# Altium PCB Z693_Test_JK08_V1.0.PcbDoc (part 2 of 2)
Units mil, origin at the board's own origin, x right, y up, seen from the top; angles counter-clockwise.
Board outline 3841.14 x 4075.65 mil, 2 copper layers (Top Layer, Bottom Layer); 150 components, 98 nets, 518 pads, 261 vias.
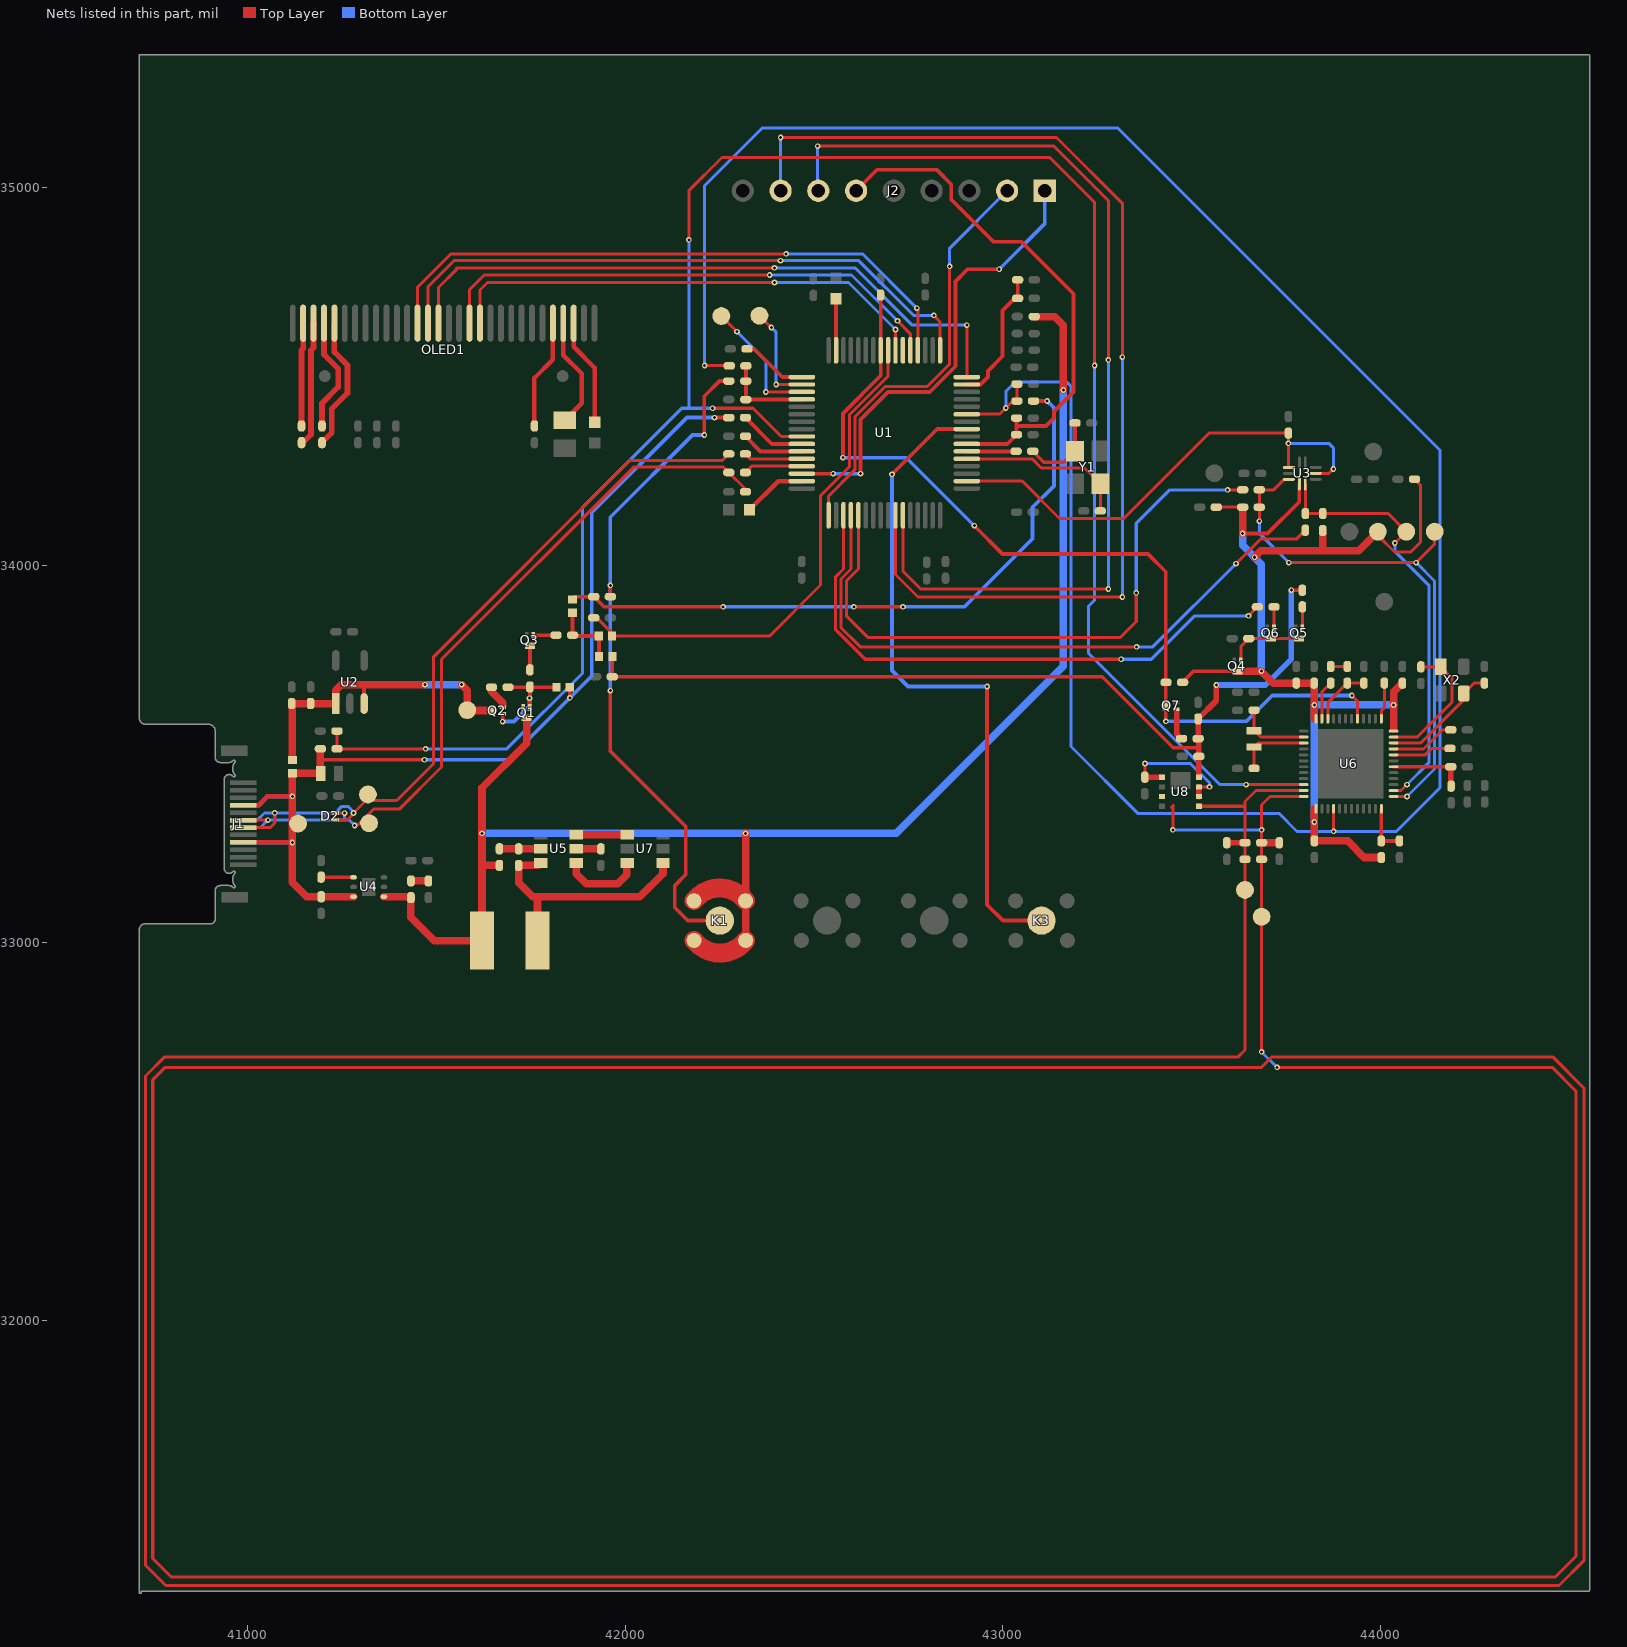
[diagram p2: the nets of this part, all layers, seen from the top]

## Via types
v1: diameter 15, hole 8, Top Layer to Bottom Layer, tented both sides, 261 vias

## Nets (pads, with @x,y where several pads share a name; then routed paths per layer and width w, separated by ;. In a path a pad name is that pad's centre, name@x,y a point inside that pad or via, vN(x,y) a via of type N, cw(c..) or ccw(c..) an arc to the next point about the centre after c; other vN are vias at no path point) (continued)
KEY-UP: K3.1 U1.9 | length 1776.9
  Top Layer w10: v1(42705.89,34240.83) 42825.73,34360.68 U1.9@42904.28,34360.68 ; v1(42957.89,33678.83) 42957.89,33100.83 42999.89,33058.83 K3.1@43102,33058.83
  Bottom Layer w10: v1(42705.89,34240.83) 42705.89,33720.94 42748,33678.83 v1(42957.89,33678.83)
LCD_D/C: OLED1.15 U1.16 | length 1714.5
  Top Layer w8: OLED1.15@41504.61,34641.09 41504.61,34735.55 41552.89,34783.83 ; 41552.89,34787.83 v1(42394.89,34787.83) ; U1.16@42904.28,34498.47 v1(42904.28,34635.83)
  Bottom Layer w8: v1(42394.89,34787.83) 42607.89,34787.83 42759.89,34635.83 v1(42904.28,34635.83)
LCD_RESET: OLED1.14 U1.17 | length 1624.7
  Top Layer w8: OLED1.14@41477.05,34641.09 41477.05,34737.99 41545.89,34806.83 v1(42410.89,34806.83) ; v1(42816.89,34661.83) 42833.42,34645.31 U1.17@42833.42,34569.34
  Bottom Layer w8: v1(42410.89,34806.83) 42617.89,34806.83 42762.89,34661.83 v1(42816.89,34661.83)
MCU_EN: D5.1 R28.1 U1.24 | length 1376.3
  Top Layer w8: R28.1@41916,33860.66 41923.9,33860.66 41964.72,33819.85 D5.1@41964.72,33812.83 42381.89,33812.83 42516.89,33947.83 42516.89,34184.39 42593.5,34261 42593.5,34398.29 42695.62,34500.41 U1.24@42695.62,34569.34
MOD_CTL: R15.1 U1.2 U3.4 U3.8 | length 1311.3
  Top Layer w8: U1.2@42904.28,34222.88 43050.84,34222.88 43149.89,34123.83 43319.89,34123.83 43545.89,34349.83 R15.1@43755.89,34349.83 ; U3.8@43757.33,34259.14 43755.89,34260.58 R15.1@43755.89,34349.83 ; R15.1@43757.33,34348.39 R15.1@43755.89,34349.83 ; U3.4@43828.2,34243.39 43863.39,34243.39 v1(43875,34255)
  Bottom Layer w8: v1(43755.89,34323) 43863,34323 43875,34311 v1(43875,34255)
NetBattery1_2: Battery1.2 C31.1 U5.6 U7.1 | length 676.3
  Top Layer w20: Battery1.2@41767,33005.83 41767,33121.83 ; U5.6@41773.89,33209.68 U5.6@41775.65,33211.43 41769.05,33204.83 C31.1@41717.22,33204.83 41717.22,33159.5 41754.89,33121.83 41767,33121.83 ; U7.1@42099.46,33211.43 42099.46,33183.41 42037.89,33121.83 41767,33121.83
NetC4_2: C4.2 R13.2 Y1.3 | length 210.9
  Top Layer w10: R13.2@43078.89,34301.83 43107.89,34272.83 43161.78,34272.83 Y1.3@43190.78,34301.83 C4.2@43190.78,34376.83
NetC5_1: C5.1 U1.5 Y1.1 | length 452.9
  Top Layer w8: U1.5@42904.28,34281.94 42905.39,34280.83 43078.68,34280.83 43101.68,34257.83 43215.78,34257.83 Y1.1@43257.78,34215.83 43257.78,34143.94 C5.1@43257.89,34143.83
NetC7_2: C7.2 U1.47 | length 170
  Top Layer w12: C7.2@42328.78,34146.76 42404.9,34222.88 U1.47@42467.28,34222.88
NetC8_2: C8.2 U1.31 | length 136.5
  Top Layer w10: C8.2@42557.78,34705.83 42557.78,34569.39 U1.31@42557.83,34569.34
NetC10_1: C10.1 C17.2 | length 46
  Top Layer w20: C10.1@41432,33163.83 C17.2@41478,33163.83
NetC19_2: C19.2 L1.1 U6.46 | length 160
  Top Layer w8: U6.46@43860.27,33593.23 43860.27,33636.1 L1.1@43912,33687.83 C19.2@43956,33687.83
NetC20_1: C20.1 D7.1 R33.2 | length 1738.8
  Top Layer w10: D7.1@41860,33909.55 41867.28,33916.83 C20.1@41916,33916.83 41943,33889.83 v1(42258.83,33889.83) ; v1(42605,33889.83) v1(42735,33889.83) ; R33.2@43080.89,34434.93 v1(43116.89,34434.93)
  Bottom Layer w10: v1(42258.83,33889.83) v1(42605,33889.83) ; v1(42735,33889.83) 42897.89,33889.83 43078.44,34070.38 43078.44,34153.55 43134.89,34210 43134.89,34416.93 v1(43116.89,34434.93)
NetC20_2: C20.2 K1.1 R45.2 | length 1815.9
  Top Layer w10: v1(41960,33667.94) 41960,33507.72 42159.89,33307.83 42159.89,33180.83 42130.89,33151.83 42130.89,33092.83 42164.89,33058.83 K1.1@42250,33058.83 ; C20.2@41960,33916.83 v1(41960,33946.94) ; v1(42208.89,34344.83) 42208.89,34447.83 42248.99,34487.93 R45.2@42273.78,34487.93
  Bottom Layer w10: v1(41960,33667.94) v1(41960,33946.94) 41960,34126.94 42177.89,34344.83 v1(42208.89,34344.83)
NetC28_1: C28.1 U6.33 | length 172.3
  Top Layer w8: U6.33@44034.48,33513.5 44113.56,33513.5 44163.89,33563.83 C28.1@44185.89,33563.83
NetC29_1: C29.1 U6.32 | length 156.6
  Top Layer w8: U6.32@44034.48,33497.76 44118.81,33497.76 44135.89,33514.83 C29.1@44184,33514.83
NetC31_2: C31.2 R37.1 U5.5 | length 109.4
  Top Layer w20: R37.1@41666.22,33248.83 C31.2@41717.22,33248.83 U5.5@41775.65,33248.83
NetC32_2: C32.2 L3.1 U6.30 | length 203.1
  Top Layer w8: L3.1@44185.57,33466.26 L3.1@44186,33465.83
  Top Layer w10: U6.30@44034.48,33466.26 L3.1@44185.57,33466.26 ; C32.2@44186,33415.72 C32.2@44186.89,33414.83
  Top Layer w15: C32.2@44186,33415.72 L3.1@44186,33465.83
NetC39_1: C39.1 R39.1 U6.24 | length 133.3
  Top Layer w10: U6.24@44002,33355.04 R39.1@44002,33269.83 C39.1@44050.1,33269.83
NetC40_1: C40.1 OLED1.3 | length 333.8
  Top Layer w15: C40.1@41146,34329.43 41146,34324.83 41167.34,34346.17 41167.34,34350.77 41167.34,34569.28 41173.9,34575.84 OLED1.3@41173.9,34641.09 OLED1.3@41174.89,34640.09
NetC40_2: C40.2 OLED1.2 | length 274
  Top Layer w15: C40.2@41142,34368.83 41142,34569.5 41146.34,34573.83 OLED1.2@41146.34,34641.09
NetC41_1: C41.1 OLED1.5 | length 358.7
  Top Layer w15: C41.1@41196.25,34324.83 41221.89,34350.47 41221.89,34413.83 41263.89,34455.83 41263.89,34529.83 41229.02,34564.71 OLED1.5@41229.02,34641.09
NetC41_2: C41.2 OLED1.4 | length 305.4
  Top Layer w15: C41.2@41196.25,34368.83 41196.25,34429.19 41238.89,34471.83 41238.89,34520.83 41201.46,34558.27 OLED1.4@41201.46,34641.09
NetC44_1: C44.1 U8.2 U8.3 U8.5 | length 338.7
  Top Layer w8: C44.1@43375.88,33438.65 43375.88,33474.88 v1(43376,33474.76) ; U8.3@43518.88,33412.83 43546.83,33412.83 v1(43547,33413)
  Top Layer w15: C44.1@43375.88,33438.65 43376.11,33438.43 U8.5@43421.24,33438.43 ; U8.2@43518.88,33387.24 U8.3@43518.88,33412.83
  Bottom Layer w8: v1(43376,33474.76) 43496.24,33474.76 43547,33424 v1(43547,33413)
NetC46_1: C46.1 OLED1.27 | length 296
  Top Layer w12: OLED1.27@41835.31,34641.09 41835.31,34556.41 41883.89,34507.83 41883.89,34428.72 C46.1@41839,34383.83
NetC47_2: C47.2 OLED1.28 | length 285.5
  Top Layer w12: OLED1.28@41862.87,34641.09 41862.87,34578.62 41919,34522.49 C47.2@41919,34378.83
NetD4_2: D4.2 Q1.1 Q2.1 R20.1 R44.2 | length 313.2
  Top Layer w10: v1(41674.86,33585.8) Q2.1@41674.86,33605.39 ; R20.1@41689,33676.83 R44.2@41746.86,33676.83 ; Q1.1@41746.86,33623.39 R44.2@41746.86,33676.83 ; R44.2@41746.9,33677.63 41746.86,33677.59 R44.2@41746.86,33676.83 ; D4.2@41817.28,33676.83 R44.2@41746.86,33676.83
  Bottom Layer w10: v1(41674.86,33585.8) 41704.86,33585.8 41745.89,33626.83 v1(41745.89,33647.83) v1@41745.89,33649.83
NetD5_2: D5.2 D6.2 D7.2 R26.2 | length 183.8
  Top Layer w10: D7.2@41860,33874.12 R26.2@41860,33814.83 41862,33812.83 D5.2@41929.28,33812.83 41930.28,33811.83 D6.2@41930.28,33758.83
NetL1_2: L1.2 L2.1 | length 44
  Top Layer w8: L2.1@43868,33731.83 L1.2@43912,33731.83
NetL2_2: L2.2 U6.47 | length 104.3
  Top Layer w8: U6.47@43844.52,33593.23 43844.52,33664.35 L2.2@43868,33687.83
NetOLED1_26: OLED1.26 R43.1 | length 292.4
  Top Layer w12: R43.1@41759,34368.83 41759,34495.94 41807.76,34544.7 OLED1.26@41807.76,34641.09
NetQ1_2: Q1.2 Q2.2 R20.2 | length 61.4
  Top Layer w20: R20.2@41645,33676.83 41645,33665.72 41674.86,33635.87 Q2.2@41674.86,33627.78
NetQ3_1: Q3.1 R26.1 | length 60
  Top Layer w10: Q3.1@41756,33814.83 R26.1@41816,33814.83
NetQ3_3: Q3.3 R44.1 | length 64.5
  Top Layer w10: R44.1@41747,33722.83 41747,33787.13 Q3.3@41747.14,33787.28
NetQ4_1: Q4.1 Q5.3 Q6.3 R31.1 | length 201
  Top Layer w8: Q4.1@43630,33746.83 43630,33784.83 R31.1@43651,33805.83 43783.7,33805.83 Q5.3@43784.14,33806.28
NetQ5_1: Q5.1 R35.1 | length 56
  Top Layer w8: Q5.1@43793,33833.83 R35.1@43793,33889.83
NetQ6_1: Q6.1 R34.1 | length 56
  Top Layer w8: Q6.1@43717.89,33833.83 R34.1@43717.89,33889.72 R34.1@43718,33889.83
NetQ7_1: Q7.1 R41.1 | length 80.4
  Top Layer w15: Q7.1@43459.89,33615.83 43459.89,33553.83 R41.1@43472.89,33540.83
NetR1_2: R1.2 R4.1 U1.15 | length 358.5
  Top Layer w10: U1.15@42904.28,34478.79 42940.17,34478.79 42960,34498.61 42960,34514.87 42998.89,34553.76 42998.89,34674.83 43030.89,34706.83 R4.1@43038.89,34706.83 R1.2@43038.89,34755.83
NetR6_1: R6.1 U1.43 | length 166.1
  Top Layer w10: R6.1@42317.78,34341.75 42357.9,34301.62 U1.43@42467.28,34301.62
NetR8_2: R8.2 U1.42 | length 178.4
  Top Layer w10: R8.2@42317.78,34390.97 42387.44,34321.31 U1.42@42467.28,34321.31
NetR9_1: R9.1 U1.44 | length 154.8
  Top Layer w8: R9.1@42317.78,34294.72 42330.57,34281.94 U1.44@42467.28,34281.94
NetR11_1: R11.1 U1.45 | length 156.4
  Top Layer w8: R11.1@42317.78,34245.7 42334.33,34262.25 U1.45@42467.28,34262.25
NetR13_1: R13.1 U1.6 | length 131.9
  Top Layer w10: U1.6@42904.28,34301.62 43035.1,34301.62 R13.1@43035.89,34300.83
NetR21_1: R21.1 U1.33 | length 176.1
  Top Layer w10: R21.1@42322,34573 42341,34573 42415.53,34498.47 U1.33@42467.28,34498.47
NetR27_2: R27.2 U4.1 | length 85.9
  Top Layer w10: R27.2@41193.89,33173.83 41194.3,33173.43 U4.1@41279.65,33173.43
NetR32_2: R32.2 U6.37 | length 97.9
  Top Layer w8: U6.37@44002,33593.23 44002,33614.52 44010,33622.52 R32.2@44010,33687.83
NetR38_1: R38.1 U5.2 | length 64.8
  Top Layer w20: U5.2@41870.13,33248.83 R38.1@41934.89,33248.83
NetT1_1: T1.1 U1.34 | length 268.6
  Top Layer w8: T1.1@42355,34661 v1(42386.5,34629.5) ; v1(42399.21,34478.79) U1.34@42467.28,34478.79
  Bottom Layer w8: v1(42386.5,34629.5) 42399.21,34616.79 v1(42399.21,34478.79)
NetT2_1: T2.1 U1.35 | length 345.2
  Top Layer w8: T2.1@42254,34660 v1(42295.5,34618.5) ; v1(42372,34459) 42372.1,34459.1 U1.35@42467.28,34459.1
  Bottom Layer w8: v1(42295.5,34618.5) 42372,34542 v1(42372,34459)
NetU5_1: U5.1 U7.6 | length 215.3
  Top Layer w20: U5.1@41870.13,33211.43 41870.13,33182.59 41895.89,33156.83 41979.89,33156.83 42002.89,33179.83 42002.89,33210.35 U7.6@42004.98,33212.43
NetU5_3: U5.3 U7.4 | length 134.8
  Top Layer w20: U5.3@41870.13,33286.24 U7.4@42004.98,33286.24
NFC_IN: Q7.3 R3.2 R30.2 U1.25 U6.41 | length 2438.7
  Top Layer w8: v1(43924,33655) 43939.01,33639.99 U6.41@43939.01,33593.23
  Top Layer w10: v1(42576,34284.83) 42576,34402 42675.94,34501.94 U1.25@42675.94,34569.34 42675.94,34715.68 R3.2@42675.78,34715.83 ; v1(42923.96,34104.76) 42998.72,34030 43384,34030 43431.33,33982.67 Q7.3@43431.33,33627.69 ; v1(43431.33,33586.67) Q7.3@43431.33,33627.69 ; Q7.3@43431.89,33628.25 Q7.3@43431.33,33627.69
  Bottom Layer w10: v1(42576,34284.83) 42743.89,34284.83 v1(42923.96,34104.76) ; v1(43431.33,33586.67) 43644.67,33586.67 43713,33655 v1(43924,33655)
NFC_VCC: C45.1 D6.1 R29.2 R35.2 R41.2 R42.2 U8.4 | length 2387.9
  Top Layer w10: D6.1@41965.72,33758.83 41965,33758.12 R29.2@41965,33704.83 43262.89,33704.83 43450.89,33516.83 43516.88,33516.83 43518.88,33518.83 ; v1(43763.89,33933.83) R35.2@43793,33933.83
  Top Layer w15: R41.2@43516.89,33540.83 43516.89,33564.83 R42.2@43516.89,33590.83 ; R42.2@43516.89,33592.83 43565,33640.94 v1(43565,33683) ; U8.4@43518.88,33438.43 C45.1@43518.88,33493.65 43518.88,33518.83 R41.2@43518.88,33540.83
  Bottom Layer w15: v1(43565,33683) 43695.06,33683 43763.89,33751.83 v1(43763.89,33933.83)
NRF_POWER_EN: R34.2 U1.51 | length 1518.5
  Top Layer w8: U1.51@42577.51,34132.33 42577.51,33990.11 42557,33969.6 42557,33829 42635,33751 v1(43313,33751) ; v1(43650.17,33866) R34.2@43673.89,33889.72
  Bottom Layer w8: v1(43313,33751) 43393,33751 43508,33866 v1(43650.17,33866)
NRST: C6.2 J2.6 R14.1 U1.7 | length 1403.2
  Top Layer w10: J2.6@42610.89,34991.83 42666.89,35047.83 42823.89,35047.83 42862.89,35008.83 42862.89,34968.83 42974.89,34856.83 43048.89,34856.83 43186.67,34719.06 43186.67,34458.95 43135.35,34407.64 43135.35,34390.13 43114.15,34368.93 43036.79,34368.93 43035.89,34369.83 ; U1.7@42904.28,34321.31 43011.36,34321.31 C6.2@43035.89,34345.83 43035.89,34369.83 ; R14.1@43035.89,34389.93 43035.89,34369.83
PWR_KEY: R33.1 R36.2 R52.2 U1.11 U6.16 | length 6355.8
  Top Layer w8: v1(42210,34529) 42274,34529 R52.2@42275,34528 ; U1.11@42904.28,34400.05 42991.05,34400.05 43025.93,34434.93 R33.1@43036.89,34434.93 R36.2@43036.89,34479.83 ; v1(43876.02,33295) U6.16@43876.02,33355.04
  Bottom Layer w8: v1(42210,34529) 42210,35006 42362,35158 43304,35158 44157,34305 44157,33410 44042,33295 v1(43876.02,33295) 43779,33295 43731,33343 43357,33343 43180,33520 43180,34474 43169,34485 43032,34485 43007.47,34460.47 v1(43007.47,34416.47)
PWR_KEY1: R45.1 R46.2 R52.1 U1.36 | length 237.6
  Top Layer w10: R52.1@42319,34528 R45.1@42318.98,34487.83 R46.2@42318.98,34438.91 42466.77,34438.91 U1.36@42467.28,34439.42
RF-1: 2.1 3.1 C30.2 C35.1 C35.2 C36.1 C36.2 C37.1 U6.11 U6.12 U8.1 U8.7 | length 22507.4
  Top Layer w8: 43447,33359 43450,33362 ; v1(43450,33299) 43450,33362 ; 43451,33363 43450,33362 ; U8.1@43518.88,33361.65 43640.65,33361.65 ; v1(43685,32711) 3.1@43685,33069 C35.1@43685,33221.11 C36.1@43685,33265.11 v1(43685,33299) 43685,33365 43707.52,33387.52 U6.12@43796.29,33387.52 ; v1(43726,32670) 44455,32670 44518,32607 44518,31375 44463,31320 40797,31320 40748,31369 40748,32637 40781,32670 43684.69,32670 43712.69,32698 44456,32698 44538.5,32615.5 44538.5,31363.5 44472.5,31297.5 40782.5,31297.5 40729,31351 40729,32647 40780,32698 43623,32698 43641,32716 2.1@43641,33140 C35.2@43641,33221.11 C36.2@43641,33265.11 43641,33299 43641,33374 43670.27,33403.27 U6.11@43796.29,33403.27
  Top Layer w15: U8.1@43518.88,33361.65 U8.1@43519.06,33361.83 ; C30.2@43593,33265 43593.11,33265.11 C36.2@43641,33265.11
  Top Layer w20: C36.1@43685,33265.11 C37.1@43732,33265.11
  Bottom Layer w8: v1(43450,33299) v1(43685,33299) ; v1(43685,32711) v1(43726,32670)
SPI1_MISO: U1.22
SPI1_MOSI: OLED1.19 U1.23 | length 1303
  Top Layer w8: OLED1.19@41614.84,34641.09 41614.84,34728.79 41634.89,34748.83 v1(42394.89,34748.83) ; U1.23@42715.31,34569.34 v1(42715.31,34624.25)
  Bottom Layer w8: v1(42394.89,34748.83) 42590.72,34748.83 v1(42715.31,34624.25)
SPI1_NSS: OLED1.13 U1.20 | length 1626.5
  Top Layer w8: OLED1.13@41449.49,34641.09 41449.49,34736.43 41537.89,34824.83 v1(42425.89,34824.83) ; v1(42771.89,34680.83) 42774.36,34678.36 U1.20@42774.36,34569.34
  Bottom Layer w8: v1(42425.89,34824.83) 42627.89,34824.83 v1(42771.89,34680.83)
SPI1_SCK: OLED1.18 U1.21 | length 1380.8
  Top Layer w8: OLED1.18@41587.28,34641.09 41587.28,34730.23 41625.89,34768.83 v1(42381.89,34768.83) ; v1(42720.39,34647.33) 42754.68,34613.05 U1.21@42754.68,34569.34
  Bottom Layer w8: v1(42381.89,34768.83) 42598.89,34768.83 v1(42720.39,34647.33)
SWCLK: R10.2 R23.2 SC1.1 U3.10 U6.25 | length 1460.3
  Top Layer w8: v1(43678.89,34116.89) R10.2@43678.89,34153.83 R23.2@43678.89,34199.83 43716.83,34199.83 43744.65,34227.65 U3.10@43757.33,34227.65 ; v1(43757,34007) v1(44094.49,34007) 44143.49,34056 SC1.1@44143.49,34089 ; U6.25@44034.48,33387.52 v1(44070,33387.52)
  Bottom Layer w8: v1(43678.89,34116.89) 43678.89,34085.11 v1(43757,34007) ; v1(44070,33387.52) 44143,33460.52 44143,33958.49 v1(44094.49,34007)
SWCLK_ST1: R23.1 U1.53 | length 1668.1
  Top Layer w8: U1.53@42616.88,34132.33 42616.88,33989.88 42585,33958 42585,33866 42643,33808 43310,33808 43353,33851 v1(43353,33927) ; v1(43595,34199.83) R23.1@43634.89,34199.83
  Bottom Layer w8: v1(43353,33927) 43353,34111 43441.83,34199.83 v1(43595,34199.83)
SWDCLK_ST: J2.2 U1.49 | length 1120.2
  Top Layer w8: U1.49@42538.14,34132.33 42538.14,34183.29 42607.5,34252.65 42607.5,34392.49 42689.01,34474 42799.84,34474 42858.89,34533.05 v1(42858.89,34791.83)
  Bottom Layer w8: v1(42858.89,34791.83) 42858.89,34839.83 J2.2@43010.89,34991.83
SWDIO: R25.2 R49.2 SD1.1 U3.2 U6.26 | length 1151.1
  Top Layer w8: U3.2@43800.64,34213.87 43800.64,34137.09 R25.2@43800.89,34136.83 44020.41,34136.83 SD1.1@44068.24,34089 44038.24,34059 v1(44038,34059) ; U6.26@44034.48,33403.27 44054.27,33403.27 v1(44070,33419)
  Bottom Layer w8: v1(44038,34059) 44038,34037 44129,33946 44129,33478 v1(44070,33419)
SWDIO_ST: J2.1 U1.46 | length 1220.9
  Top Layer w10: U1.46@42467.28,34242.57 v1(42550.31,34242.57) ; v1(42622.5,34242.57) 42622.5,34386.27 42695.23,34459 42806.06,34459 42873.89,34526.83 42873.89,34751.89 42906,34784 v1(42990,34784)
  Bottom Layer w10: v1(42550.31,34242.57) v1(42622.5,34242.57) ; v1(42990,34784) 43110.89,34904.89 J2.1@43110.89,34991.83
SWDIO_ST1: R25.1 U1.52 | length 1687.2
  Top Layer w8: U1.52@42597.2,34132.33 42597.2,33990 42571,33963.8 42571,33834.8 42621.8,33784 v1(43354,33784) ; v1(43617,34004) 43682,34069 43777.06,34069 R25.1@43800.89,34092.83
  Bottom Layer w8: v1(43354,33784) 43397,33784 v1(43617,34004)
UART1_RX: J2.7 U1.59 | length 2686.7
  Top Layer w8: v1(42509,35110) 43135,35110 43279,34966 v1(43279,34544) ; U1.59@42734.99,34132.33 42734.99,33984.01 42782,33937 v1(43279,33937)
  Bottom Layer w8: J2.7@42509,34993.72 v1(42509,35110) ; v1(43279,33937) v1(43279,34544)
UART1_TX: J2.8 U1.58 | length 2943.5
  Top Layer w8: v1(42411,35133) 43142,35133 43316,34959 v1(43316,34551) ; U1.58@42715.31,34132.33 42715.31,33975.69 42775,33916 v1(43316,33916)
  Bottom Layer w8: J2.8@42410.89,34991.83 42411,34991.94 v1(42411,35133) v1@42410.89,35132.89 ; v1(43316,33916) v1(43316,34551)
USB_D+: D2.2 D+1.1 J1.A6 J1.B6 R11.2 R12.1 | length 2058.3
  Top Layer w8: J1.A6@40988,33324.94 v1(41052.89,33324.94) ; D2.2@41231.89,33343.55 v1(41256.17,33343.55) ; v1(41282.89,33310.83) 41282.89,33311.83 41290.89,33311.83 41332.89,33353.83 41400.89,33353.83 41512.89,33465.83 41512.89,33750.83 42021.89,34259.83 42259.65,34259.83 R11.2@42273.78,34245.7 42317.78,34201.7 R12.1@42317.78,34194.68 ; D+1.1@41320.89,33316.83 D+1.1@41335.89,33316.83
  Bottom Layer w8: J1.B6@40988,33305.26 41033.2,33305.26 v1(41052.89,33324.94) 41256.17,33324.94 ; v1(41256.17,33343.55) 41256.17,33324.94 ; v1(41282.89,33310.83) 41268.78,33324.94 41256.17,33324.94
USB_D-: D2.1 D-1.1 J1.A7 J1.B7 R9.2 | length 2038.1
  Top Layer w8: J1.A7@40988,33305.26 41059.26,33305.26 41071.11,33317.11 v1(41071.11,33344) ; D2.1@41231.89,33325.83 41232.05,33325.68 41263.58,33325.68 41279.89,33341.99 v1(41279.89,33343.83) 41312.89,33376.83 41393.89,33376.83 41491.89,33474.83 41491.89,33757.83 42011.89,34277.83 42256.89,34277.83 R9.2@42273.78,34294.72
  Bottom Layer w8: J1.B7@40988,33324.94 41024.94,33324.94 41043.71,33343.71 41074.02,33343.71 41214.89,33343.83 41231.18,33343.83 41248.77,33361.42 41265.3,33361.42 v1@41279.89,33346.83
USB_INS: R5.1 R7.2 U1.41 U6.10 | length 5609.2
  Top Layer w8: R5.1@41236,33509.83 R5.1@41236,33513.83 ; R7.2@41236,33560.83 R5.1@41236,33513.83 ; v1(41470.89,33513.83) R5.1@41236,33513.83 ; v1(42168,34862) 42168,34992 42256,35080 43124,35080 43243,34961 v1(43243,34529) ; v1(42230.89,34415.83) 42337.89,34415.83 42352.89,34400.83 ; 42342.76,34410.97 42352.89,34400.83 ; U1.41@42467.28,34340.99 42412.73,34340.99 42352.89,34400.83 ; v1(43643.98,33419.02) U6.10@43796.29,33419.02
  Bottom Layer w8: v1(41470.89,33513.83) 41685.89,33513.83 41886.89,33714.83 41886.89,34153.83 42148.89,34415.83 v1(42230.89,34415.83) ; 42168,34416.83 v1(42168,34862) ; v1(43243,34529) 43243,33908 43226.5,33891.5 43226.5,33766.75 43574.24,33419.02 v1(43643.98,33419.02)
USB_VBUS: C9.2 D1.1 D3.2 D4.1 J1.A4 J1.A9 J1.B4 J1.B9 R5.2 R8.1 U4.3 V1.1 | length 2885.9
  Top Layer w10: 41192,33484.83 v1(41467.89,33484.83) ; v1(41852.72,33648.66) D4.1@41852.72,33676.83 ; v1(42236.02,34390.97) R8.1@42273.78,34390.97
  Top Layer w12: J1.A9@40988,33265.89 40988.06,33265.83 v1(41117.89,33265.83) ; J1.A4@40988,33364.32 41028.32,33364.32 41051.83,33387.83 v1(41117.89,33387.83)
  Top Layer w20: R5.2@41192,33513.83 41192,33484.83 41192,33449.61 D3.2@41192.77,33448.83 41118.17,33448.83 D1.1@41117.89,33449.12 v1(41117.89,33387.83) v1(41117.89,33265.83) 41117.89,33159.83 41155.48,33122.24 U4.3@41279.65,33122.24
  Bottom Layer w10: v1(41467.89,33484.83) 41688.89,33484.83 v1(41852.72,33648.66) 41910.89,33706.83 41910.89,34138.83 42163.02,34390.97 v1(42236.02,34390.97) v1@42234.89,34389.83
  Bottom Layer w12: J1.B4@40988,33265.89 41094.89,33265.89 ; J1.B9@40988,33364.32 41028.32,33364.32 41051.83,33387.83 v1(41117.89,33387.83) ; 41094.94,33265.83 v1(41117.89,33265.83)
VCC_5V: 1.1 C1.1 C2.1 D1.2 Q2.3 U2.1 U2.3 | length 829.8
  Top Layer w10: U2.3@41307.69,33633.66 41307.69,33683.83
  Top Layer w20: C2.1@41116,33633.83 C2.1@41116.17,33633.66 ; D1.2@41117.89,33484.55 41117.89,33631.94 C2.1@41116.17,33633.66 ; v1(41468.89,33683.83) 41307.69,33683.83 41247.89,33683.83 41232.89,33668.83 U2.1@41232.89,33633.66 C2.1@41116.17,33633.66 ; v1(41566,33683.72) 41580.89,33668.83 1.1@41580.89,33616.25 ; 1.1@41580.89,33615.83 41581.47,33615.25 Q2.3@41645.3,33615.25
  Bottom Layer w20: v1(41468.89,33683.83) 41565.89,33683.83 v1(41566,33683.72)
VCC_RCBAT: Battery1.1 C10.2 K1.2 Q1.3 R37.2 R47.2 U4.4 | length 4021.5
  Top Layer w20: U4.4@41360.35,33122.24 C10.2@41431.59,33122.24 ; C10.2@41432,33121.83 C10.2@41431.59,33122.24 ; Battery1.1@41620.22,33006.06 Battery1.1@41620,33005.83 ; R37.2@41666.22,33204.83 41621,33204.83 41620,33205.83 ; Q1.3@41738,33593.83 41738,33528 41620,33410 v1(41620,33290) 41620,33205.83 ; K1.2@42318.17,33006.84 K1.2@42318.17,33111.27 v1(42318.17,33290) ; R47.2@43082.89,34658.73 43137.27,34658.73 43160,34636 v1(43160,34464) ; C10.2@41431.59,33122.24 41431.59,33068.13 41493.89,33005.83 Battery1.1@41620,33005.83 ; Battery1.1@41620,33005.83 41620,33205.83
  Top Layer w30: K1.2@42181.38,33006.84 K1.2@42181.83,33006.4 ; K1.2@42318.17,33006.84 K1.2@42318.62,33006.4
  Bottom Layer w20: v1(41620,33290) v1(42318.17,33290) 42717.17,33290 43160,33732.83 v1(43160,34464)
VDD_NRF: 4.1 C22.1 C23.1 C25.1 C38.1 Q4.3 R10.1 R30.1 R39.2 R49.1 R50.1 R51.1 U3.1 U6.13 U6.36 U6.48 | length 2889.8
  Top Layer w8: R50.1@43565.17,34153.83 R10.1@43634.89,34153.83 ; 4.1@43993,34089 43993,34079.25 44037.25,34035 44080,34035 44106,34061 44106,34212 R51.1@44090,34228
  Top Layer w10: R30.1@43474.89,33689.83 43504.33,33719.28 43620.7,33719.28 Q4.3@43621.14,33718.83 ; v1(43634.89,34084) 43701,34084 43784.89,34167.89 U3.1@43784.89,34215.83
  Top Layer w20: Q4.3@43621.14,33719.28 v1(43684.45,33719.28) 43715.89,33687.83 C23.1@43776.9,33687.83 C22.1@43824,33687.83 C22.1@43824.77,33687.06 ; v1(43634.89,34084) R10.1@43634.89,34153.83 ; v1(43666.5,34021.15) 43683.35,34038 43942,34038 4.1@43993,34089 ; 43824.52,33593.23 v1(43824.52,33630) C22.1@43824.52,33684.35 ; 43824.58,33355.04 v1(43824.58,33320) 43824.58,33270.14 C38.1@43824.89,33269.83 43913.17,33269.83 43957.17,33225.83 R39.2@44002,33225.83 ; 43847,34038 R49.1@43847,34092 ; 44034.48,33566.75 v1(44034.48,33630) 44034.48,33664.32 C25.1@44058,33687.83
  Bottom Layer w20: v1(43634.89,34084) 43634.89,34052.76 43684.45,34003.2 v1(43684.45,33719.28) ; v1(43824.58,33320) 43824.52,33320.06 v1(43824.52,33630) v1(44034.48,33630)
XC1: C26.1 U6.34 X2.3 | length 316.1
  Top Layer w8: U6.34@44034.48,33529.25 44106.31,33529.25 44220.56,33643.5 X2.3@44220.56,33660.37 44248.02,33687.83 C26.1@44275,33687.83
XC2: C24.1 U6.35 X2.1 | length 352.4
  Top Layer w8: U6.35@44034.48,33545 44097.26,33545 44189.45,33637.19 44189.45,33701.29 X2.1@44159.44,33731.3 44158.98,33730.83 C24.1@44106.89,33730.83
XL1: C18.1 U6.2 X1.1 | length 192.3
  Top Layer w8: C18.1@43665,33615.83 X1.1@43665,33561.83 43681.83,33545 U6.2@43796.29,33545
XL2: C21.1 U6.3 X1.2 | length 192.4
  Top Layer w8: C21.1@43665,33461.83 X1.2@43665,33518.53 43675.72,33529.25 U6.3@43796.29,33529.25
pads on no net: J1.0 J1.A2 J1.A3 J1.A8 J1.A10 J1.A11 J1.B2 J1.B3 J1.B8 J1.B10 J1.B11 K1.4 K2.4 K3.4 K4.4 OLED1.0 OLED1.7 OLED1.20 OLED1.21 OLED1.22 OLED1.23 OLED1.24 OLED1.25 U1.3 U1.4 U1.26 U1.27 U1.38 U1.39 U1.50 U1.54 U1.55 U1.56 U1.57 U1.61 U1.62 U2.4 U4.6 U4.7 U5.4 U6.4 U6.5 U6.6 U6.7 U6.8 U6.9 U6.14 U6.15 U6.17 U6.18 U6.19 U6.20 U6.21 U6.22 U6.23 U6.27 U6.28 U6.29 U6.40 U6.42 U6.43 U6.44 U7.2 U7.5 U8.0

## Polygon pours and split planes (outlines as drawn)
GND on Top Layer "Top Layer-No Net" (solid, remove dead copper): 44551,35349.94 40714.89,35349.94 40714.89,32924 44550.31,32924 44551,32924.72
GND on Bottom Layer "Top Layer-No Net" (solid, remove dead copper): 44551,35349.94 40714.89,35349.94 40714.89,32924 44550.31,32924 44551,32924.72

## Keep-outs
Keep-Out Layer:
  lines w5: 40714.89,31279.31 40714.89,33034.31 cw(c40728.67,33034.31) 40728.67,33048.09 40901.9,33048.09 ccw(c40901.9,33061.87) 40915.68,33061.87 40915.68,33137.46 cw(c40927.49,33137.46) 40927.49,33149.27 40949.7,33149.27 cw(c40949.7,33137.46) 40958.51,33145.34 ccw(c40962.91,33149.27) 40966.85,33153.68 cw(c40974.72,33162.48) 40962.91,33162.48 40962.91,33173.08 cw(c40974.72,33173.08) 40966.85,33181.88 ccw(c40962.91,33186.28) 40958.48,33190.19 cw(c40949.62,33198) 40951.1,33186.28 cw(c40951.1,33198.09) 40939.29,33198.09 ; 40714.89,31285 44551,31285 44551,32910.83 44551,35349.94 40714.89,35349.94 40714.89,33594.94 ccw(c40728.67,33594.94) 40728.67,33581.16 40895.99,33581.16 cw(c40895.99,33561.48) 40915.68,33561.48 40915.68,33491.79 ccw(c40927.49,33491.79) 40927.49,33479.98 40949.7,33479.98 ccw(c40949.7,33491.79) 40958.51,33483.92 cw(c40962.91,33479.98) 40966.85,33475.58 ccw(c40974.72,33466.78) 40962.91,33466.78 40962.92,33456.03 ccw(c40974.72,33456.57) 40966.85,33447.77 cw(c40962.91,33443.37) 40958.48,33439.46 ccw(c40949.62,33431.65) 40951.1,33443.37 ; 40939.29,33198.09 40939.29,33431.56 ; 40939.29,33198.09 40939.29,33431.56 ; 40939.29,33431.56 cw(c40951.1,33431.56) 40951.1,33443.37 ; 40939.29,33431.56 cw(c40951.1,33431.56) 40951.1,33443.37

## Other copper
Top Layer:
  rectangle net NetQ1_2: 41666.89,33618.83 41733.89,33632.83
  pour cut-out: 44551,32920 44551,33476 44275.89,33476 44275.89,32920
Bottom Layer:
  pour cut-out: 44551,32920 44551,33476 44275.89,33476 44275.89,32920

## Silkscreen, mask and mechanical layers (free items; w line width, h text height)
Top Overlay:
  text "-" at 41751,32858 h60
  text "+" at 41600,32855 h60
Mechanical 2:
  lines w5: 40915.68,33111.09 40990.48,33111.09 40990.48,33159.12 40963.4,33159.12 ; 40915.68,33518.17 40990.48,33518.17 40990.48,33468.96 40963.11,33468.96 ; 40939.29,33202.23 41002.88,33202.23 41002.88,33210.49 40939.29,33210.49 ; 40939.29,33221.91 41002.88,33221.91 41002.88,33230.18 40939.29,33230.18 ; 40939.29,33241.6 41002.88,33241.6 41002.88,33249.47 40939.29,33249.47 ; 40939.29,33261.28 41002.88,33261.28 41002.88,33269.55 40939.29,33269.55 ; 40939.29,33280.97 41002.88,33280.97 41002.88,33289.23 40939.29,33289.23 ; 40939.29,33300.65 41002.88,33300.65 41002.88,33308.92 40939.29,33308.92 ; 40939.29,33320.33 41002.88,33320.34 41002.88,33328.61 40939.29,33328.61 ; 40939.29,33340.02 41002.88,33340.02 41002.88,33348.29 40939.29,33348.29 ; 40939.29,33359.71 41002.88,33359.71 41002.88,33367.98 40939.29,33367.98 ; 40939.29,33379.39 41002.88,33379.39 41002.88,33387.66 40939.29,33387.66 ; 40939.29,33399.08 41002.88,33399.08 41002.88,33407.35 40939.29,33407.35 ; 40939.29,33418.76 41002.88,33418.76 41002.88,33427.03 40939.29,33427.03

## Dimensions
44551,35349.94 to 44551,31285 on Top Overlay
40714.89,35349.94 to 44551,35349.94 on Top Overlay

## Text inside footprints (layer, text, board x,y; h text height)
OLED1: Top Overlay "1" at 41054,34639.81 h25 r180